# EAGLE board UDOO_CONNECTIVITY_SHIELD_v1 (EAGLE 7.1.0)
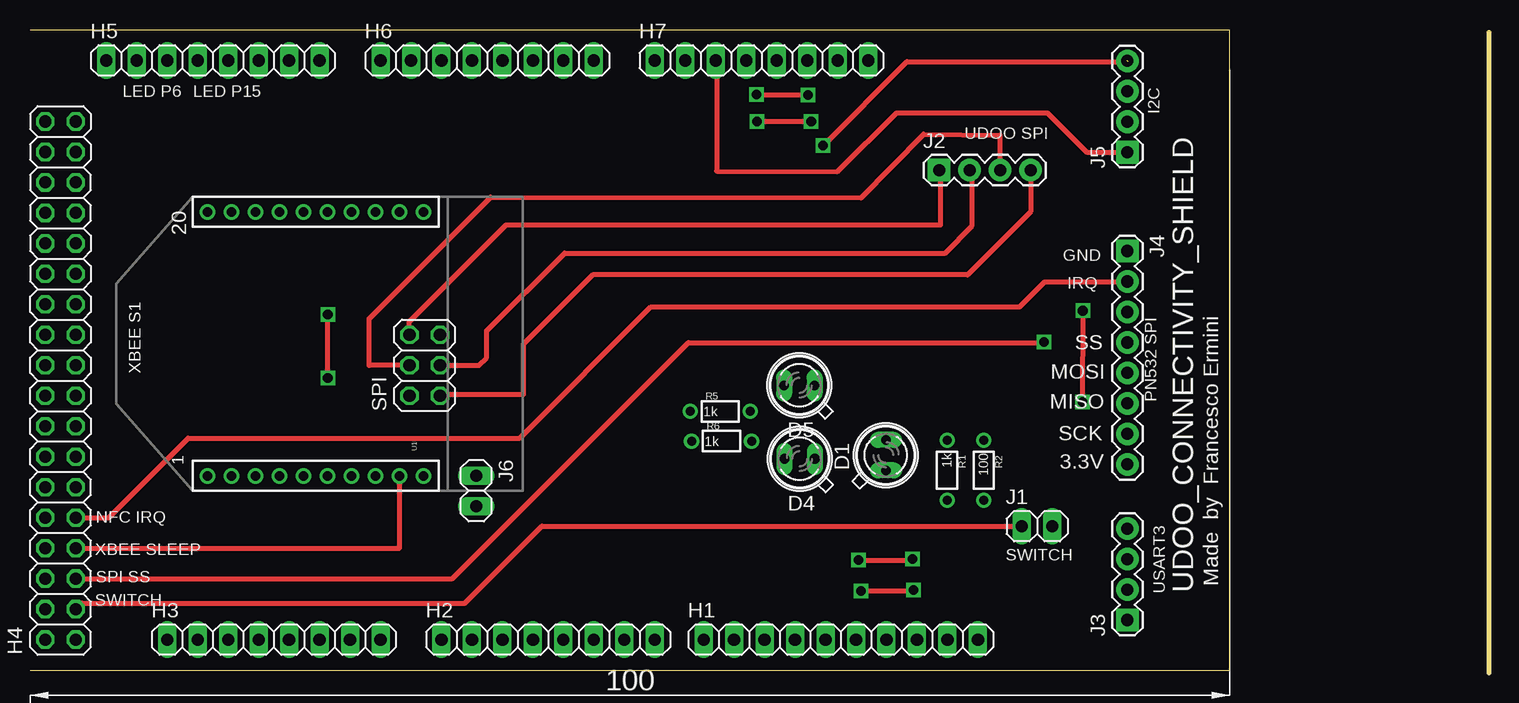
[diagram p0: board, top side]
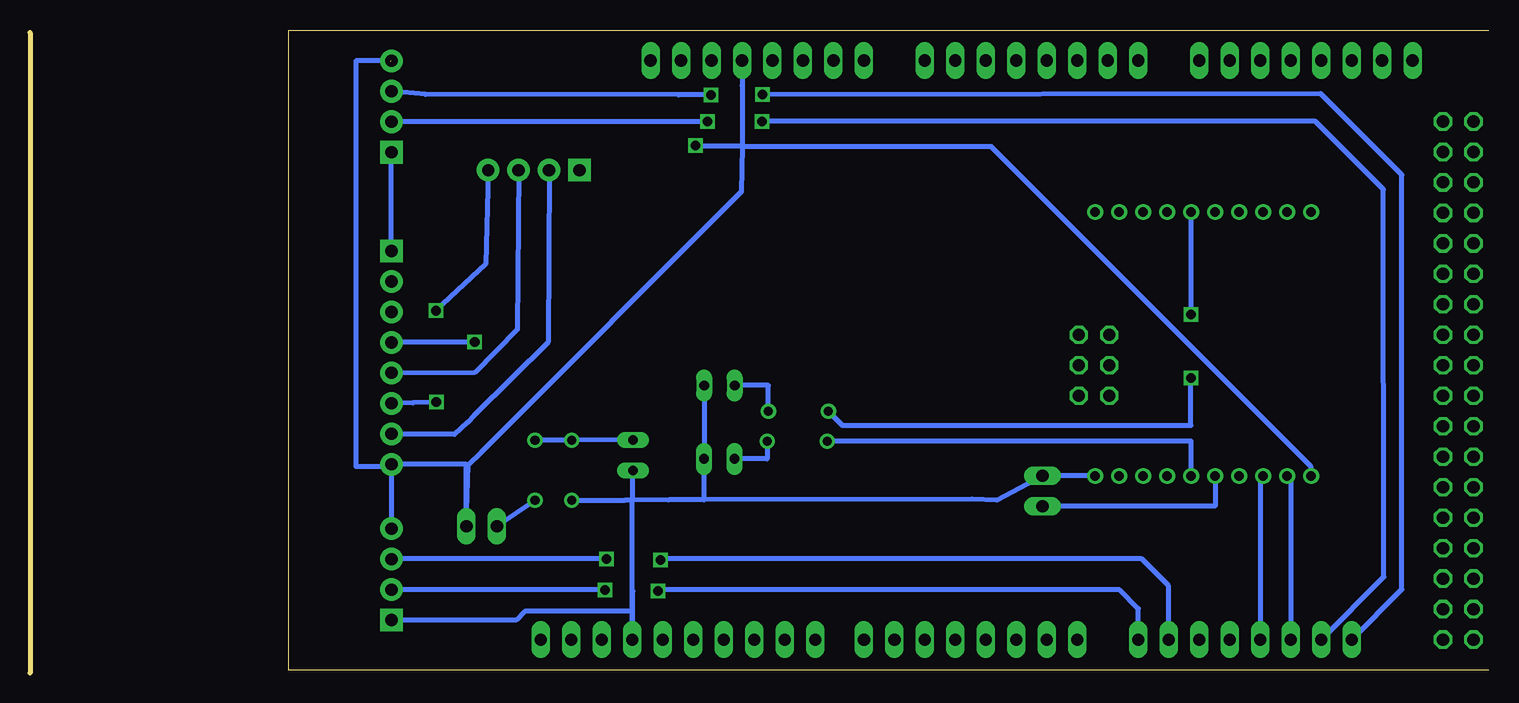
[diagram p1: board, bottom side, seen from below]

Size 121.56 x 53.57 mm. Coordinates in mm from the lower left corner, seen from the top.
Outline: 121.56,53.34 121.56,0
Outline: 0,0.23 100,0.23 100,53.57 0,53.57
Copper layers (1*16): Top 0.035mm / dielectric 1.5mm / Bottom 0.035mm
Design rules "default": minimum track width 10mil, minimum drill 24mil, track to track 8mil, track to pad 8mil, pad to pad 8mil, via to via 8mil, smd to smd 8mil, copper to edge 40mil, drill to drill 8mil, minimum pad ring 10mil, minimum via ring 8mil, stop-mask expansion 4mil, vias tented up to drill 0mil, thermal gap 10mil
Net classes: 0 default: width 0.254 mm

## Footprints (pad centres in the part's own frame; a part is rotated, then mirrored left to right if it is on the bottom)
SFH480 = drill 0.813 long: A 1.27,0; K -1.27,0
1X10 = drill 1.016 long: 1 -11.43,0; 2 -8.89,0; 3 -6.35,0; 4 -3.81,0; 5 -1.27,0; 6 1.27,0; 7 3.81,0; 8 6.35,0; 9 8.89,0; 10 11.43,0
1X08 = drill 1.016 long: 1 -8.89,0; 2 -6.35,0; 3 -3.81,0; 4 -1.27,0; 5 1.27,0; 6 3.81,0; 7 6.35,0; 8 8.89,0
2X18 = drill 1.016 octagon: 1 -21.59,-1.27; 2 -21.59,1.27; 3 -19.05,-1.27; 4 -19.05,1.27; 5 -16.51,-1.27; 6 -16.51,1.27; 7 -13.97,-1.27; 8 -13.97,1.27; 9 -11.43,-1.27; 10 -11.43,1.27; 11 -8.89,-1.27; 12 -8.89,1.27; 13 -6.35,-1.27; 14 -6.35,1.27; 15 -3.81,-1.27; 16 -3.81,1.27; 17 -1.27,-1.27; 18 -1.27,1.27; 19 1.27,-1.27; 20 1.27,1.27; 21 3.81,-1.27; 22 3.81,1.27; 23 6.35,-1.27; 24 6.35,1.27; 25 8.89,-1.27; 26 8.89,1.27; 27 11.43,-1.27; 28 11.43,1.27; 29 13.97,-1.27; 30 13.97,1.27; 31 16.51,-1.27; 32 16.51,1.27; 33 19.05,-1.27; 34 19.05,1.27; 35 21.59,-1.27; 36 21.59,1.27
1X02 = drill 1.016 long: 1 -1.27,0; 2 1.27,0
1X04 = drill 1.016 pad 1.88 square: 1 0,0 | drill 1.016 pad 1.88: 2 2.54,0; 3 5.08,0; 4 7.62,0
1X08' = drill 1.016 pad 1.88 square: 1 0,0 | drill 1.016 pad 1.88: 2 2.54,0; 3 5.08,0; 4 7.62,0; 5 10.16,0; 6 12.7,0; 7 15.24,0; 8 17.78,0
1/6W-RES = drill 0.762: 1 -2.5,0; 2 2.5,0
2X03 = drill 1.016 octagon: 1 -2.54,-1.27; 2 -2.54,1.27; 3 0,-1.27; 4 0,1.27; 5 2.54,-1.27; 6 2.54,1.27
XBEE-1 = drill 0.8: 1 -11,20; 2 -11,18; 3 -11,16; 4 -11,14; 5 -11,12; 6 -11,10; 7 -11,8; 8 -11,6; 9 -11,4; 10 -11,2; 11 11,2; 12 11,4; 13 11,6; 14 11,8; 15 11,10; 16 11,12; 17 11,14; 18 11,16; 19 11,18; 20 11,20

## Placement (x,y rotation side)
D1  [SFH480]  71.32,18.14 90 top
D4  [SFH480]  64.14,17.83 180 top
D5  [SFH480]  64.11,23.95 180 top
H1  [1X10]  67.56,2.77 0 top  (not fitted)
H2  [1X08]  43.18,2.77 0 top  (not fitted)
H3  [1X08]  20.32,2.77 0 top  (not fitted)
H4  [2X18]  2.54,24.36 90 top  (not fitted)
H5  [1X08]  15.24,51.03 0 top  (not fitted)
H6  [1X08]  38.1,51.03 0 top  (not fitted)
H7  [1X08]  60.96,51.03 0 top  (not fitted)
J1  [1X02]  83.92,12.22 0 top
J2  [1X04]  75.77,41.88 0 top
J3  [1X04]  91.44,4.39 90 top
J4  [1X08']  91.44,35.15 270 top
J5  [1X04]  91.44,43.38 90 top
J6  [1X02]  37.19,15.16 270 top
R1  1k  [1/6W-RES]  76.43,16.89 270 top
R2  100  [1/6W-RES]  79.48,16.89 270 top
R5  1k  [1/6W-RES]  57.53,21.79 0 top
R6  1k  [1/6W-RES]  57.63,19.3 0 top
SPI  [2X03]  32.89,25.63 90 top  (not fitted)
U1  XBEE  [XBEE-1]  34.8,27.41 90 top

## Library data of the parts
D1 D4 D5 = led
H1-H7 J1 J6 SPI = pinhead
J2-J5 = SparkFun-Connectors
R1 R2 R5 R6 = SparkFun-Passives
U1 = SparkFun

## Nets
S$1: H7.5 J1.2 J3.4 J4.8 J5.4 U1.1
S$3: H3.1 J5.3
S$5: H3.4 U1.3
S$6: H3.3 U1.2
S$7: H4.3 J1.1 R2.2
S$8: J2.4 J4.6 SPI.1
S$9: J2.2 J4.7 SPI.3
S$10: J6.2 U1.5
S$11: J2.1 SPI.6
S$12: J2.3 J4.5 SPI.4
S$13: H4.5 J4.4
S$14: H4.7 U1.9
S$15: H3.7 J3.3
S$16: D1.A R1.1 R2.1
S$17: R6.1 U1.6
S$18: H4.9 J4.2
S$19: R5.1 U1.15
S$21: H3.2 J5.2
S$22: H7.3 J4.1 J5.1
S$23: H3.8 J3.2
S$24: D1.K D4.K D5.K H1.7 J3.1 J6.1 R1.2 U1.10
S$25: D5.A R5.2
S$26: D4.A R6.2
S$27: H4.35

## Tracks (layer width: path | path; a pad name or v marks a point on that pad's centre or on a via)
S$1  (via drill 0.8)  (1 unrouted)
  Top 0.406: v66.09,43.94 73.08,50.93 91.52,50.93
  Bottom 0.406: 62.23,43.89 62.23,43.84 | 62.23,43.84 62.28,40.11 83.95,18.36 85.04,17.32 J1.2 85.19,17.37 J4.8 | U1.1 14.8,17.16 41.43,43.79 41.43,43.84 62.23,43.84 | J4.8 J3.4 | 62.23,48.95 H7.5 62.23,43.89 | J5.4 94.41,51 94.41,17.2 91.44,17.2 J4.8 | 62.23,43.89 66.09,43.89 v66.09,43.94
S$3  (via drill 0.8)
  Top 0.406: v60.53,48.18 61.32,48.16 v64.82,48.16
  Bottom 0.406: H3.1 7.24,6.96 7.24,41.5 14.02,48.26 v60.53,48.18 | v64.82,48.16 67.54,48.16 88.59,48.21 J5.3
S$5
  Bottom 0.406: U1.3 19.05,16.41 H3.4
S$6
  Bottom 0.406: U1.2 16.51,16.41 H3.3
S$7
  Top 0.406: H4.3 4.32,5.82 36.25,5.82 42.65,12.22 J1.1
  Bottom 0.406: R2.2 J1.1
S$8  (via drill 0.8)
  Top 0.406: J2.4 83.39,38.43 78.13,33.17 46.91,33.17 41.12,27.38 41.12,23.19 34.27,23.19 SPI.1 | v87.73,30.18 v87.71,22.56
  Bottom 0.406: 91.44,22.43 J4.6 89.66,22.5 v87.71,22.56 | J2.4 83.59,34.06 v87.73,30.18
S$9
  Top 0.406: SPI.3 37.41,25.63 38.05,26.26 38.05,28.52 44.55,34.98 76.28,34.98 78.51,37.26 78.51,41.68 J2.2
  Bottom 0.406: J2.2 78.38,27.56 84.51,21.51 85.14,20.85 86.18,19.86 91.42,19.89 J4.7
S$10
  Bottom 0.406: U1.5 22.8,13.89 J6.2
S$11
  Top 0.406: SPI.6 31.62,29.26 39.67,37.34 75.89,37.34 75.89,41.48 J2.1
S$12
  Top 0.406: SPI.4 28.3,25.63 28.27,25.6 28.27,29.51 38.38,39.65 69.27,39.57 74.47,44.88 80.82,44.81 80.82,41.91 J2.3
  Bottom 0.406: J2.3 80.95,28.63 84.51,25.02 91.42,24.97 J4.5
S$13  (via drill 0.8)
  Top 0.406: H4.5 35.2,7.85 54.86,27.51 84.45,27.51 v84.51,27.56
  Bottom 0.406: v84.51,27.56 91.42,27.56 J4.4
S$14
  Top 0.406: H4.7 30.8,10.39 U1.9
S$15  (via drill 0.8)
  Top 0.406: v69.04,9.4 73.43,9.4 v73.53,9.5
  Bottom 0.406: H3.7 26.67,7.24 28.93,9.5 68.94,9.5 v69.04,9.4 | v73.53,9.5 91.42,9.5 J3.3
S$16
  Bottom 0.406: D1.A R1.1 R2.1
S$17
  Bottom 0.406: U1.6 24.8,19.3 R6.1
S$18
  Top 0.406: H4.9 6.55,12.93 13.18,19.56 40.79,19.56 51.74,30.51 82.47,30.51 84.56,32.59 91.42,32.59 J4.2
S$19  (via drill 0.8)
  Top 0.406: v24.82,24.56 v24.82,29.84
  Bottom 0.406: R5.1 53.86,20.62 24.82,20.62 v24.82,24.56 | v24.82,29.84 24.8,29.86 U1.15
S$21  (via drill 0.8)
  Top 0.406: v60.58,45.95 v65.1,45.95
  Bottom 0.406: H3.2 8.74,8 8.79,40.28 14.45,45.95 v60.58,45.95 | v65.1,45.95 65.13,45.92 J5.2
S$22
  Top 0.406: H7.3 57.23,50.95 57.23,41.81 67.26,41.76 72.21,46.66 84.78,46.66 88.06,43.38 J5.1
  Bottom 0.406: J4.1 J5.1
S$23  (via drill 0.8)
  Top 0.406: v69.24,6.83 73.56,6.83 v73.64,6.91
  Bottom 0.406: H3.8 29.21,5.36 30.76,6.91 69.16,6.91 v69.24,6.83 | v73.64,6.91 91.42,6.91 J3.2
S$24
  Bottom 0.406: 71.37,6.45 H1.7 | H1.7 71.32,6.81 | H1.7 71.37,14.39 | 71.37,14.39 71.96,14.39 | R1.2 71.96,14.39 | 71.37,14.39 71.35,14.39 D1.K | 68.35,14.41 43.05,14.48 41.02,14.4 J6.1 37.16,16.41 U1.10 | 68.35,14.41 71.95,14.4 71.96,14.39 | H1.7 71.37,5.13 80.31,5.13 81.05,4.39 J3.1 | D5.K 65.38,17.83 | 68.35,14.41 65.38,14.41 65.38,17.83 | 65.38,17.83 D4.K
S$25
  Bottom 0.406: R5.2 60.03,23.95 D5.A
S$26
  Bottom 0.406: R6.2 60.13,17.83 D4.A
S$27
  Bottom 0.406: H4.35 3.99,46.13

## Text on the board
tPlace: 20 | 1 | UDOO_CONNECTIVITY_SHIELD
tNames: LED P6 | LED P15 | I2C | UDOO SPI | GND | IRQ | SS | XBEE S1 | MOSI | MISO | PN532 SPI | SCK | 3.3V | NFC IRQ | XBEE SLEEP | SWITCH | SPI SS | Made by Francesco Ermini | USART3 | SWITCH
tTest: GND | SCK | MOSI | MISO
bDocu: GND | MOSI | SCK | MISO | DIN | 3.3V | DOUT | RST | GND | SLEEP